# Allegro board 555-timer.brd
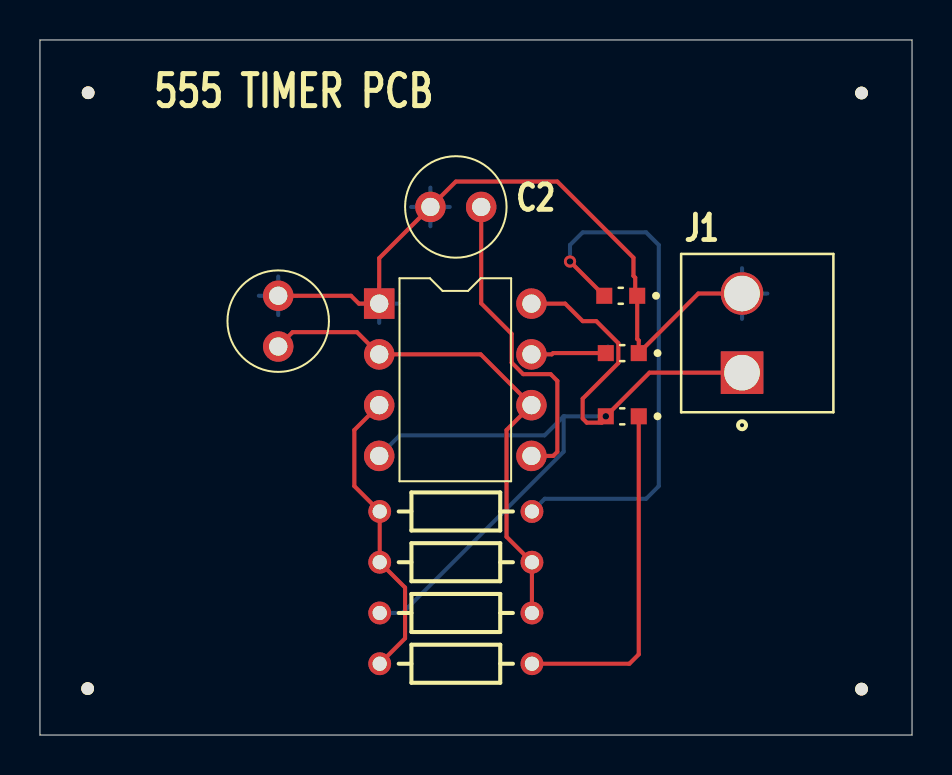
[diagram p0: board, top side]
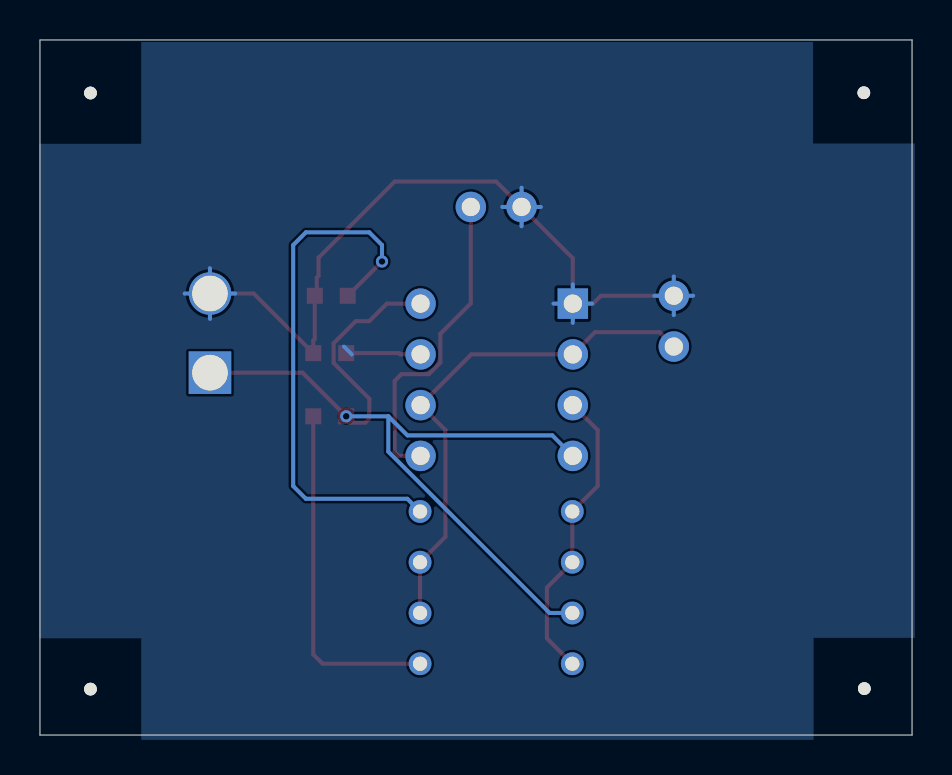
[diagram p1: board, bottom side, seen from below]

Outline 43.65 x 34.79 mm; copper layers: TOP, BOTTOM. Coordinates in mm from the lower left corner of the outline.
Outline path: 0,34.79 0,0 43.65,0 43.65,34.79 0,34.79

## Design rules (mm)
constraint set DEFAULT: min track width 0.203

## Placement (name value [footprint] x y rotation side)
C1  10u  [CAP196]  11.93 21.98 180 top
C2  10n  [CAP196]  19.55 26.43 270 top
D7  SML-D12M1WT86  [LED_SML-D12M1WT86]  29.07 21.98 180 top
D8  SML-D12M1WT86  [LED_SML-D12M1WT86]  29.15 19.11 180 top
D9  SML-D12M1WT86  [LED_SML-D12M1WT86]  29.15 15.95 180 top
J1  640445-2  [TE_640445-2]  35.14 18.14 90 top
NOREF  -  [unnamed]  41.12 32.13 0 top
NOREF#2  -  [unnamed]  41.12 2.3 0 top
NOREF#3  -  [unnamed]  2.39 2.32 0 top
NOREF#4  -  [unnamed]  2.41 32.14 0 top
R1  240  [AXRC05]  24.63 3.57 180 top
R2  240  [AXRC05]  17.01 11.19 0 top
R3  36k  [AXRC05]  24.63 8.65 180 top
R4  220k  [AXRC05]  17.01 6.11 0 top
U2  555B  [DIP8_3]  16.98 21.59 0 top

## Library data of the parts
C1 C2 = C
D7-D9 = SML-D12M1WT86
J1 = 640445-2
R1-R4 = R
U2 = 555B

## Footprints (pads in the part's own frame, mm; a bottom-side part is the same pattern mirrored in y, then rotated)
AXRC05
  round 1.143 hole 0.711: 1(0,0) 2(7.62,0)
CAP196
  round 1.524 hole 0.914: 1(0,0) 2(0,2.54)
DIP8_3
  rect 1.524x1.524 hole 0.914: 1(0,0)
  round 1.524 hole 0.914: 2(0,-2.54) 3(0,-5.08) 4(0,-7.62) 5(7.62,-7.62) 6(7.62,-5.08) 7(7.62,-2.54) 8(7.62,0)
LED_SML-D12M1WT86
  rect 0.8x0.8 smd: A(0.825,0) C(-0.825,0)
TE_640445-2
  rect 2.128x2.128 hole 1.778: 1(0,0)
  round 2.128 hole 1.778: 2(3.96,0)
unnamed
  round 0.635 hole 3.175 unplated: (0,0)

## Nets
0: C1.1 C2.1 D7.C D8.C J1.2 U2.1
CONTROL: C2.2 U2.5
DISCHARGE: D8.A U2.7
OUT: R1.2 R2.1 R3.2 U2.3
THRESHOLD: C1.2 R3.1 R4.2 U2.2 U2.6
N00720: D7.A R2.2
N00819: D9.A J1.1 R4.1 U2.4 U2.8(VCC)
N02974: D9.C R1.1

## Via types
v1: diameter 0.61, hole 0.33, TOP to BOTTOM, 2 vias

## Routing (per net, layer and track width the routed paths; a pad name or vN(x,y) marks a point on that pad's centre or on a via; arc(x,y) is an arc through that point)
0: length 51.6
  TOP w0.203: J1.2 32.95,22.1 D8.C 29.97,19.74 29.9,19.82 D7.C ; 29.79,22.26 29.79,22.89 29.71,22.98 29.71,23.89 25.9,27.7 20.82,27.7 C2.1 16.98,23.86 U2.1 15.96,21.59 15.57,21.98 C1.1
  BOTTOM w0.203: 16.01,21.59 U2.1 ; U2.1 17.95,21.59 ; U2.1 16.98,22.56 ; U2.1 16.98,20.62 ; 35.14,20.83 J1.2 ; J1.2 35.14,23.36 ; J1.2 33.87,22.1 ; J1.2 36.41,22.1 ; C2.1 20.51,26.43 ; C2.1 19.55,25.46 ; C2.1 18.58,26.43 ; C2.1 19.55,27.39 ; 28.04,19.05 28.44,19.44 ; C1.1 11.93,22.95 ; C1.1 10.96,21.98 ; C1.1 11.93,21.02 ; C1.1 12.89,21.98
CONTROL: length 16
  TOP w0.203: U2.5 25.69,13.97 25.9,14.17 25.9,17.73 25.56,18.06 24.19,18.06 23.61,18.64 23.61,20.08 22.09,21.6 C2.2
DISCHARGE: length 3.7
  TOP w0.203: U2.7 25.62,19.05 25.68,19.11 D8.A
OUT: length 15
  TOP w0.203: R1.2 18.28,4.84 18.28,7.38 R3.2 R2.1 15.74,12.46 15.74,15.27 U2.3
THRESHOLD: length 25.9
  TOP w0.203: C1.2 12.64,20.16 15.87,20.16 U2.2 22.06,19.05 U2.6 23.36,15.27 23.36,9.92 R3.1 R4.2
N00720: length 27.2
  TOP w0.203: D7.A v1(26.53,23.7)
  BOTTOM w0.203: v1(26.53,23.7) 26.53,24.52 27.17,25.16 30.34,25.16 30.98,24.52 30.98,12.46 30.34,11.82 25.26,11.82 R2.2
N00819: length 45.3
  TOP w0.203: J1.1 30.51,18.14 v1(28.32,15.95) 28.32,15.84 28.12,15.63 27.37,15.63 27.17,15.84 27.17,16.83 28.95,18.62 28.95,19.61 27.84,20.71 27.17,20.71 26.29,21.59 U2.8
  BOTTOM w0.203: 26.21,15.95 25.26,15 18.01,15 U2.4 ; 26.21,15.95 26.21,14.18 18.14,6.11 R4.1 ; 26.21,15.95 v1(28.32,15.95)
N02974: length 17.5
  TOP w0.203: D9.C 29.97,4.04 29.5,3.57 R1.1

## Copper pours and planes (outline as drawn; the poured copper is in the pictures)
0 on BOTTOM: -0.14,34.68 -0.14,-0.24 43.68,-0.24 43.68,34.68

## Text on the board
Ref Des/Silkscreen Top: 555 TIMER PCB
